# EAGLE board Social Distancing Sensor and Alarm (EAGLE 9.7.0)

Size 132.83 x 65.65 mm. Coordinates in mm from the lower left corner, seen from the top.
Outline: 0,0 132.83,0 132.83,65.65 0,65.65 0,0
Copper layers (1*16): Top 0.035mm / dielectric 1.5mm / Bottom 0.035mm
Design rules "default": minimum track width 6mil, minimum drill 0.35mm, track to track 6mil, track to pad 6mil, pad to pad 6mil, via to via 6mil, smd to smd 6mil, copper to edge 40mil, drill to drill 6mil, minimum pad ring 10mil, minimum via ring 8mil, stop-mask expansion 4mil, vias tented up to drill 0mil, thermal gap 10mil

## Footprints (pad centres in the part's own frame; a part is rotated, then mirrored left to right if it is on the bottom)
BATTERY-GENERIC = drill 1.118 pad 3.15 octagon: + 2.54,0; - -2.54,0
CAP-THRU-2.54MM = drill 1.016 pad 1.88: 1 -1.27,0; 2 1.27,0
LEDRD254W60D565H860B = drill 0.981 pad 1.581: 1 -1.27,0; 2 1.27,0
PIEZO = drill 1 pad 1.6: 1 -3.5,0; 2 3.5,0
28027 = drill 1.016 long: 1 -2.54,0; 2 0,0; 3 2.54,0
RESAD1016W63L850D250B = drill 0.83 pad 1.43: 1 -5.08,0; 2 5.08,0
DIP826W53P254L959H508Q8B = drill 0.786 pad 1.386: 1 -4.13,3.81; 2 -4.13,1.27; 3 -4.13,-1.27; 4 -4.13,-3.81; 5 4.13,-3.81; 6 4.13,-1.27; 7 4.13,1.27; 8 4.13,3.81

## Placement (x,y rotation side)
BAT14  6V  [BATTERY-GENERIC]  8.26,57.34 0 top
C3  10p  [CAP-THRU-2.54MM]  69.97,33.9 0 top
C4  10u  [CAP-THRU-2.54MM]  78.86,19.93 270 top
D4  RED  [LEDRD254W60D565H860B]  97.91,31.36 180 top
PIEZO2  PIEZO  [PIEZO]  105.53,13.58 180 top
PIR2  PIR-SENSOR_28027  [28027]  111.88,59.3 0 top
R5  k  [RESAD1016W63L850D250B]  104.26,38.98 0 top
R6  1k  [RESAD1016W63L850D250B]  68.7,11.04 90 top
R7  100k  [RESAD1016W63L850D250B]  78.86,46.6 90 top
R8  22k  [RESAD1016W63L850D250B]  78.86,28.82 90 top
U2  LM555_DIP  [DIP826W53P254L959H508Q8B]  64.89,27.55 90 top

## Library data of the parts
BAT14 C3 C4 PIEZO2 PIR2 R5-R8 = Tinkercad
D4 = Tinkercad; CATEGORY: Opto-Electronic; SUB-CATEGORY: LED; VALUE: LED_RED
U2 = Tinkercad; CATEGORY: IC_Clock-Timing; CURRENT-SUPPLY: 10mA; DESCRIPTION: IC OSC SINGLE TIMER 100KHZ 8-DIP; FREQUENCY: 100kHz; MANUFACTURER: Texas Instruments; MPN: LM555CN/NOPB; OPERATING_TEMP: 0°C to 70°C; PART_STATUS: Active; ROHS_COMPLIANT: ROHS3 Compliant; SUB-CATEGORY: Timer

## Nets
BAT14+: BAT14.+ C4.1 C4.2 PIR2.2 R8.1 U2.2 U2.3 U2.6 U2.8
BAT14-: BAT14.- C3.2 PIEZO2.1 PIR2.3 R6.1 R7.2 U2.1
D4_A: D4.1 R5.1
D4_C: D4.2 PIEZO2.2
PIR2_OUT: PIR2.1 R5.2
U2_!RST: R6.2 U2.4
U2_CV: C3.1 U2.5
U2_DIS: R7.1 R8.2 U2.7

## Tracks (layer width: path | path; a pad name or v marks a point on that pad's centre or on a via)
BAT14+  (8 unrouted)
BAT14-  (6 unrouted)
D4_A  (1 unrouted)
D4_C  (1 unrouted)
PIR2_OUT  (1 unrouted)
U2_!RST  (1 unrouted)
U2_CV  (1 unrouted)
U2_DIS  (2 unrouted)